# Altium PCB PCB_Motor_controller.PcbDoc
Units mil, origin at the board's own origin, x right, y up, seen from the top; angles counter-clockwise.
Board outline 3691 x 2349 mil, 2 copper layers (Top Layer, Bottom Layer); 38 components, 33 nets, 163 pads, 0 vias.
Unrouted connection lines stored in the file: 2.
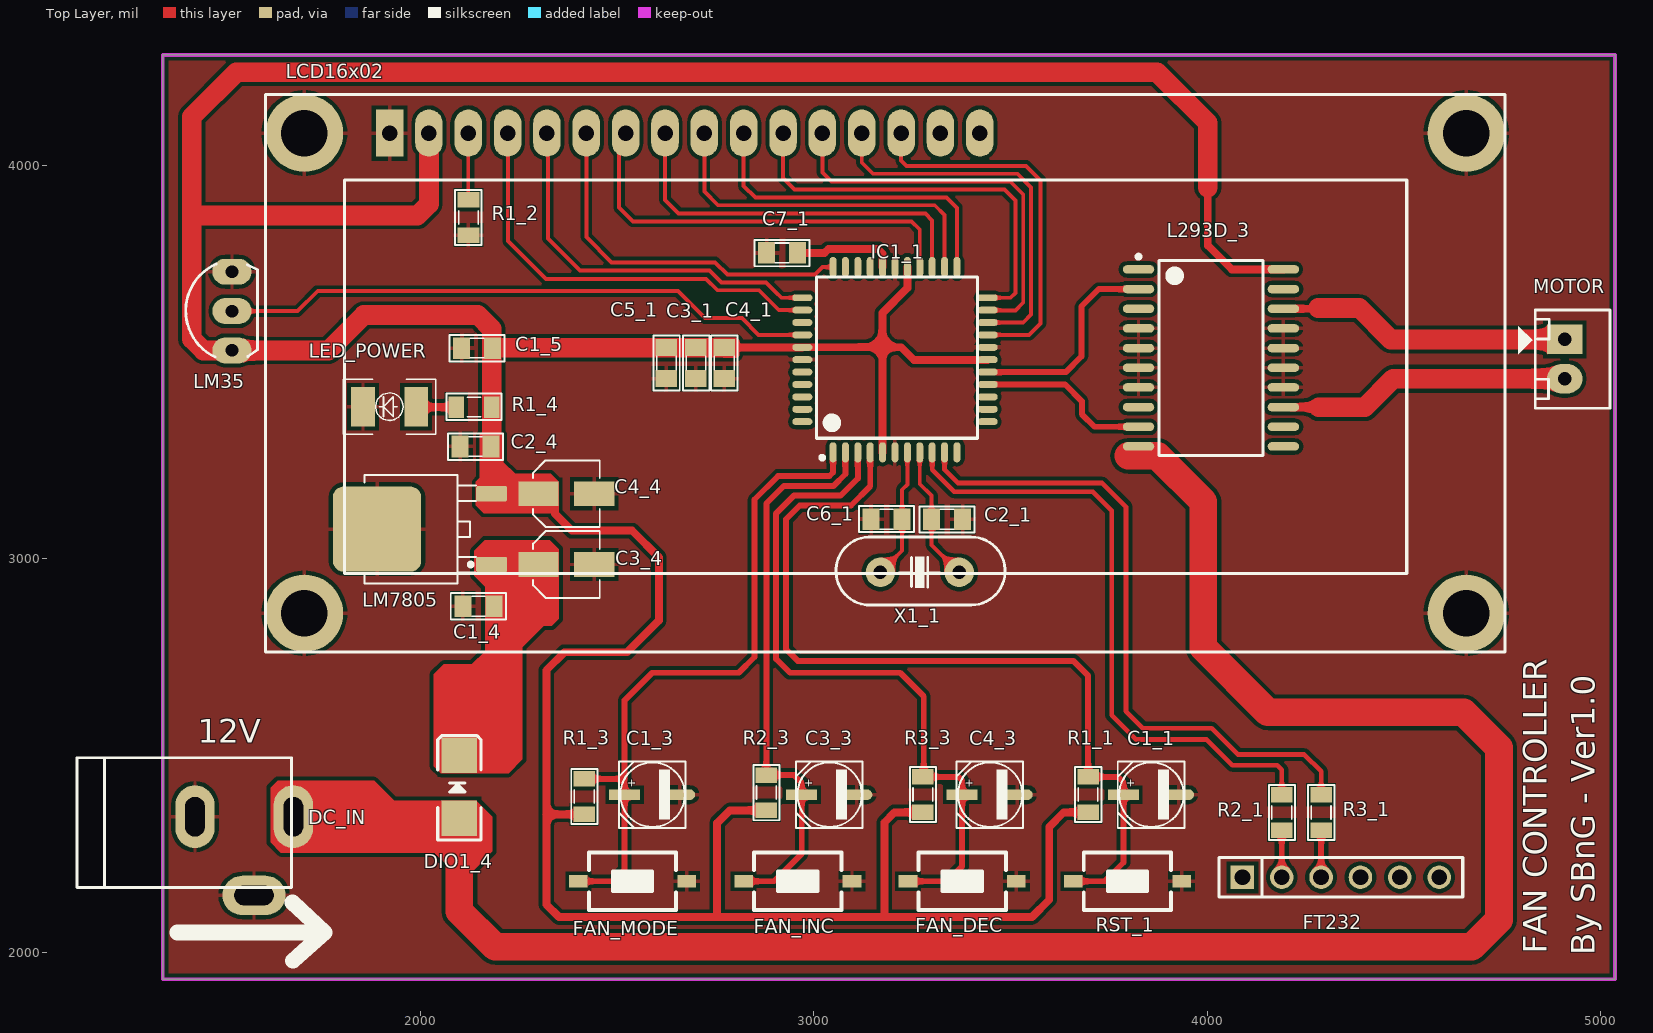
[diagram p0: Top Layer view]
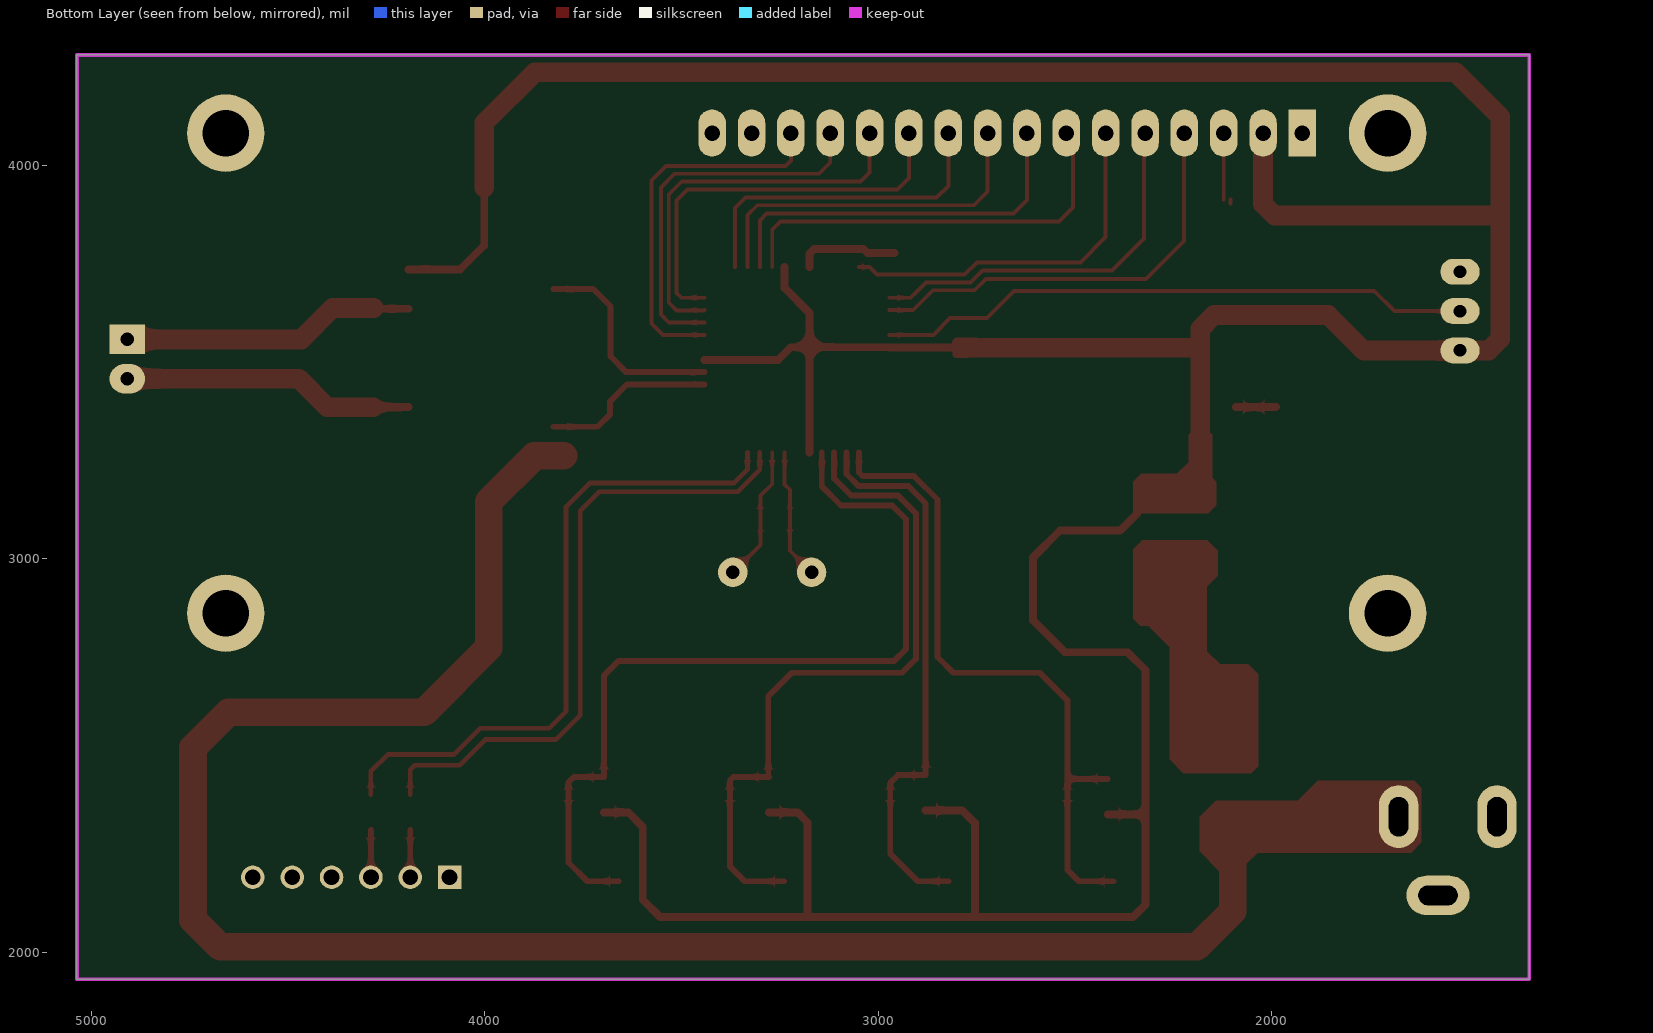
[diagram p1: Bottom Layer view, seen from below]
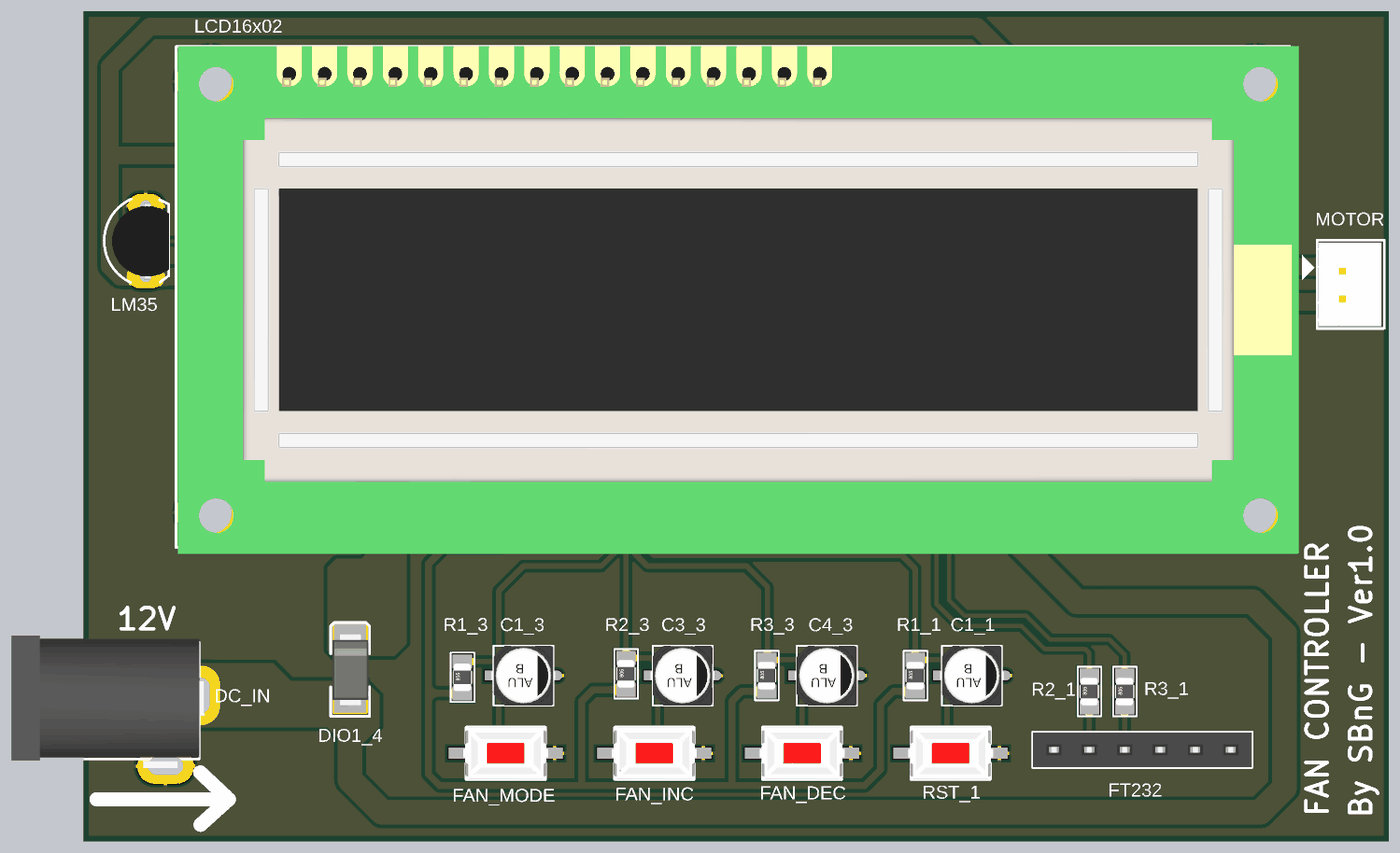
[diagram p2: 3D render of the assembled board from above, using the file's embedded part models]

## Layer stack, top to bottom
Top Solder: solder mask 0.4, Solder Resist, Dk 3.5
Top Layer: signal copper 1.4
Dielectric 1: dielectric 12.6, FR-4, Dk 4.8
Bottom Layer: signal copper 1.4
Bottom Solder: solder mask 0.4, Solder Resist, Dk 3.5

## Board outline
1346,1931 5037,1931 5037,4280 1346,4280

## Design rules (kind name [scope] priority, off if disabled: settings)
Clearance [All] p1: gap=10 ignorepadtopadclearanceinfootprint=FALSE except(0: Arc-Hole Track-Hole SMDPad-Hole THPad-Hole Via-Hole Fill-Hole Poly-Hole Region-Hole Text-Hole)
PolygonConnect [All] p1: connectstyle=Relief reliefconductorwidth=10 reliefentries=4 polygonreliefangle="90 Angle" airgapwidth=10
RoutingVias [All] p1: holewidth=28 width=50 viastyle="Through Hole" minholewidth=28 minwidth=50 maxholewidth=28 maxwidth=50
SolderMaskExpansion [All] p1: expansion=4 istentingtop=FALSE
Width CRYSTAL [InNetClass('CRYSTAL')] p1: maxlimit=10 minlimit=10 preferedwidth=10
Width TXRX [InNetClass('TXRX')] p2: maxlimit=15 minlimit=10 preferedwidth=12
Width DIGITAL [InNetClass('DIGITAL')] p3: maxlimit=20 minlimit=10 preferedwidth=15
Width ANALOG [InNetClass('ANALOG')] p4: maxlimit=30 minlimit=10 preferedwidth=20
Width POWER [InNetClass('POWER')] p5: maxlimit=70 minlimit=20 preferedwidth=50
30 further rules are at their usual default settings.

## Classes and differential pairs
net class CRYSTAL: XTAL1 XTAL2
net class TXRX: FT_RXD FT_TXD MCU_RXD MCU_TXD
net class ANALOG: LM35_OUT
net class DIGITAL: FAN_DEC FAN_INC FAN_MODE LCD0 LCD1 LCD2 LCD3 LCD4 LCD5 LCD6 LCD7 LCD_E LCD_RS LCD_RW MOTOR_OUT1 MOTOR_OUT2 NetLCD16x02_3 RST
net class POWER: +12_A +12_B AREF GND MOTOR_+ MOTOR_- VCC VCC_LED_IN
component class U_SENSOR: C1_5 LM35
component class U_POWER: C1_4 C2_4 C3_4 C4_4 DC_IN DIO1_4 LED_POWER LM7805 R1_4
component class U_MOTOR: C1_3 C3_3 C4_3 FAN_DEC FAN_INC FAN_MODE L293D_3 MOTOR R1_3 R2_3 R3_3
component class U_MCU: C1_1 C2_1 C3_1 C4_1 C5_1 C6_1 C7_1 FT232 IC1_1 R1_1 R2_1 R3_1 RST_1 X1_1
component class U_LCD: LCD16x02 R1_2

## Components (designator, comment, footprint, x,y, rotation, side; value= is the part's Value field where it differs from the comment)
C1_1 "10uF/50V" CAP-ALU-SMD-5.5x5.5 3857.8,2400 r0 top
C1_3 "10uF/50V" CAP-ALU-SMD-5.5x5.5 2590,2400 r0 top
C1_4 "104" CN-SMD-0805 2148,2879 r0 top value=33pF
C1_5 "104" CN-SMD-0805 2145,3535 r0 top value=33pF
C2_1 "22p" CN-SMD-0805 3339.36,3099.99 r0 top value=33pF
C2_4 "104" CN-SMD-0805 2141.36,3284.99 r0 top value=33pF
C3_1 "104" CN-SMD-0805 2701.01,3496.63 r90 top value=33pF
C3_3 "10uF/50V" CAP-ALU-SMD-5.5x5.5 3040,2400 r0 top
C3_4 "1000uF/25V" CAP-ALU-SMD-4.5x5x1.4 2372,2985 r0 top
C4_1 "104" CN-SMD-0805 2773.01,3496.63 r90 top value=33pF
C4_3 "10uF/50V" CAP-ALU-SMD-5.5x5.5 3447.8,2400 r0 top
C4_4 "1000uF/25V" CAP-ALU-SMD-4.5x5x1.4 2372,3165 r0 top
C5_1 "104" CN-SMD-0805 2626.01,3496.63 r90 top value=33pF
C6_1 "22p" CN-SMD-0805 3185.64,3100.01 r180 top value=33pF
C7_1 "104" CN-SMD-0805 2920,3777 r0 top value=33pF
DC_IN "Jac DC" DC0 1553,2244 r0 top
DIO1_4 "Diode SMD" DIO-SMD-106 2100,2420 r270 top value=1N5007
FAN_DEC "RST" SW1-SMD 3377.8,2180 r180 top value="SW chip 2 pin"
FAN_INC "RST" SW1-SMD 2960,2180 r180 top value="SW chip 2 pin"
FAN_MODE "RST" SW1-SMD 2540,2180 r180 top value="SW chip 2 pin"
FT232 "JP6" JP6-C1T 4090,2190 r0 top
IC1_1 "ATMEL 16A" TQFP44 3207.01,3505.47 r90 top value="Atmega 16L"
L293D_3 "L293D" SO20 4010,3510 r0 top
LCD16x02 "LCD 16x2A" LCD16X2 1922.54,4081.47 r0 top value=LCD16x2A
LED_POWER "LED" LED-RED-0805 1990,3386 r180 top value="LED 3 - 5 ly 2 Colour"
LM35 "LM35" TO92-123 1522,3629 r90 top
LM7805 "LM78xx" TO252-123 2036.33,3074.96 r90 top
MOTOR "MOTOR" Header2 4909,3557 r270 top
R1_1 "10k" RES-SMD-0805 3697.8,2400 r90 top
R1_2 "1k" RES-SMD-0805 2123,3867 r270 top
R1_3 "10k" RES-SMD-0805 2417.2,2395 r90 top
R1_4 "1k" RES-SMD-0805 2137,3385 r180 top
R2_1 "10k" RES-SMD-0805 4190,2355 r90 top
R2_3 "10k" RES-SMD-0805 2880,2405 r90 top
R3_1 "10k" RES-SMD-0805 4290,2355 r90 top
R3_3 "10k" RES-SMD-0805 3277.8,2400 r90 top
RST_1 "RST" SW1-SMD 3797.8,2180 r180 top value="SW chip 2 pin"
X1_1 "8Mhz" XT2 3270,2965 r0 top value=4Mhz

## Footprints (in the part's own frame and the unit in brackets; to place one, negate y for a bottom-side part, rotate by r counter-clockwise, add the part's x,y. Pads: shape width x height; smd on the part's side, far side on the other; paste and mask are expansions set on the pad)
CAP-ALU-SMD-4.5x5x1.4 [mm]
  rect 2.6x1.6 smd: 1(-1.8,0) 2(1.8,0)
  silkscreen extent -2.15,-2.15 2.15,2.15, body extent -2.5,-2.15 2.5,2.15, height 5.45
CAP-ALU-SMD-5.5x5.5 [mm]
  rect 2x0.7 smd: 1(-1.778,0)
  oval 2x0.7 smd: 2(1.778,0)
  silkscreen extent -2.15,-2.15 2.15,2.15, body extent -2.3,-2.15 2.3,2.15, height 5.4
CN-SMD-0805 [mil]
  rect 43.31x55 smd: 1(-39.36,0.01) 2(39.37,0.01)
  silkscreen extent -70,-34 70,33, body extent -39,-25 39,25, height 31
DC0 [mil] "Jac DC input"
  oval 100x160 hole 50 slot 100 at 90 deg: 1(125,100) 2(-125,100)
  oval 160x100 hole 50 slot 100 at 0 deg: 3(25,-100)
  silkscreen extent -425,-80 120,250, body extent -410,-105 134,269, height 434
DIO-SMD-106 [mil]
  rect 90x90.55 smd: 1(80,0) 2(-80,0)
  silkscreen extent -130,-55 135,55, body extent -99,-50 106,52, height 95
Header2 [mil] "CON2"
  rect 75x90 hole 34: 1(0,0)
  oval 75x90 hole 34: 2(100,0)
  silkscreen extent -75,-118 175,115, body extent -68,-70 168,107, height 236
JP6-C1T [mm] "6 row, straight, gold plating"
  rect 1.52x1.52 hole 1.02: 1(0,0)
  round 1.52 hole 1.02: 2(2.54,0) 3(5.08,0) 4(7.62,0) 5(10.16,0) 6(12.7,0)
  silkscreen extent -1.52,-1.27 14.22,1.27, body extent -1.52,-1.25 14.22,1.25, height 8.51
LCD16X2 [mm] "LCD dipslay 16x2, 16 pin"
  round 5 hole 3: 1(-5.5,-31) 1(-5.5,0) 1(69.5,-31) 1(69.5,0)
  rect 1.778x3.048 hole 1: 1(0,0)
  oval 1.778x3.048 hole 1: 2(2.54,0) 3(5.08,0) 4(7.62,0) 5(10.16,0) 6(12.7,0) 7(15.24,0) 8(17.78,0) 9(20.32,0) 10(22.86,0) 11(25.4,0) 12(27.94,0) 13(30.48,0) 14(33.02,0) 15(35.56,0) 16(38.1,0)
  round 0 all layers, no hole: ""(-5.5,0)
  silkscreen extent -8,-33.5 72,2.5, body extent -7.87,-33.96 72.64,2.54, height 18.14
LED-RED-0805 [mil]
  rect 60x100 smd: 1(0,0) 2(135,0)
  silkscreen extent -50,-70 185,70, body extent -20,-60 154,60, height 75
RES-SMD-0805 [mil]
  rect 39.37x55 smd: 1(-45,0) 2(45,0)
  silkscreen extent -70,-34 70,33, body extent -39,-25 39,25, height 31
SO20 [mm] "SOIC, 20-Leads, Body 12.60x7.50mm, Pitch 1.27mm, IPC Medium Density"
  oval 2.032x0.55 smd: 1(-4.675,5.715) 2(-4.675,4.445) 3(-4.675,3.175) 4(-4.675,1.905) 5(-4.675,0.635) 6(-4.675,-0.635) 7(-4.675,-1.905) 8(-4.675,-3.175) 9(-4.675,-4.445) 10(-4.675,-5.715) 11(4.675,-5.715) 12(4.675,-4.445) 13(4.675,-3.175) 14(4.675,-1.905) 15(4.675,-0.635) 16(4.675,0.635) 17(4.675,1.905) 18(4.675,3.175) 19(4.675,4.445) 20(4.675,5.715)
  silkscreen extent -4.8,-6.3 3.35,6.66, body extent -5.07,-6.3 5.07,6.3, height 2.25
SW1-SMD [mm]
  rect 1.2x0.8 smd: 1(-3.5,0) 2(3.5,0)
  silkscreen extent -2.82,-1.85 2.82,1.85, body extent -3.05,-1.85 3.05,1.85, height 2.5
TO92-123 [mil] "TO-92"
  oval 66x100 hole 32: 1(-100,0) 2(0,0) 3(100,0)
  silkscreen extent -117,-65 120,118, body extent -109,-66 109,95, height 245
TO252-123 [mm]
  round 0.5 on Mech15: 0(0,0)
  rrect25% 1x2 smd: 1(-2.285,-3.7) 3(2.285,-3.7)
  rrect25% 5.5x5.7 smd: 2(0,3.7)
  silkscreen extent -3.5,-2.7 3.5,4.5, body extent -3.3,-3.95 3.3,5.76, height 2.31
TQFP44 [mm] "TQFP, 44-Leads, Body 10X10mm, Pitch 0.80mm, IPC High Density"
  oval 1.3x0.45 smd: 1(-5.981,4) 2(-5.981,3.2) 3(-5.981,2.4) 4(-5.981,1.6) 5(-5.981,0.8) 6(-5.981,0) 7(-5.981,-0.8) 8(-5.981,-1.6) 9(-5.981,-2.4) 10(-5.981,-3.2) 11(-5.981,-4) 23(5.981,-4) 24(5.981,-3.2) 25(5.981,-2.4) 26(5.981,-1.6) 27(5.981,-0.8) 28(5.981,0) 29(5.981,0.8) 30(5.981,1.6) 31(5.981,2.4) 32(5.981,3.2) 33(5.981,4)
  oval 0.45x1.3 smd: 12(-4,-5.981) 13(-3.2,-5.981) 14(-2.4,-5.981) 15(-1.6,-5.981) 16(-0.8,-5.981) 17(0,-5.981) 18(0.8,-5.981) 19(1.6,-5.981) 20(2.4,-5.981) 21(3.2,-5.981) 22(4,-5.981) 34(4,5.981) 35(3.2,5.981) 36(2.4,5.981) 37(1.6,5.981) 38(0.8,5.981) 39(0,5.981) 40(-0.8,5.981) 41(-1.6,5.981) 42(-2.4,5.981) 43(-3.2,5.981) 44(-4,5.981)
  silkscreen extent -6.45,-5.33 5.33,5.07, body extent -5.99,-5.96 6.01,6.04, height 1.05
XT2 [mil] "Footpin for Crystal 2 pin"
  round 75 hole 34: 1(-100,0) 2(100,0)
  silkscreen extent -213,-83 217,90, body extent -216,-87 216,90, height 144

## Part data
C1_1 C1_3 C3_3 C3_4 C4_3 C4_4: library part CN-ALU-SMD, "Polarized Capacitor (Axial)", LatestRevisionDate=17-Jul-2002, LatestRevisionNote="Re-released for DXP Platform.", PackageReference=POLAR0.8, Published=8-Jun-2000, Publisher="Altium Limited"
C1_4 C1_5 C2_1 C2_4 C3_1 C4_1 C5_1 C6_1 C7_1: library part CN
DC_IN: library part DCIN, "Jac DC input"
DIO1_4: "Default Diode", Code - JEDEC=DO-214-AB, Published=8-Jun-2000, Publisher="Altium Limited", Revision="July-2002: Re-released for DXP Platform."
FAN_DEC FAN_INC FAN_MODE RST_1: library part SW2, "Switch button 2 pin"
FT232: "WR-PHD 2.54 mm Angled Socket Header", Manufacturer="W¨¹rth Elektronik eiSos GmbH", partNo=613006143121, ComponentLink1 Description=Manufacturer, ComponentLink1URL=http://www.we-online.com, ComponentLink2 Description=Datasheet, ComponentLink2URL=http://katalog.we-online.de/em/datasheet/6130xx143121.pdf, Created by="Karrer Zheng", Created Date="29 March 2013", NoPins=06
IC1_1: library part ATmega16A-AU, "8-bit AVR Microcontroller, 16KB Flash, 512 Bytes EEPROM, 1KB SRAM, 44-pin TQFP, Industrial Grade (-40°C to 85°C)"
L293D_3: library part L293D_SMD, "Push-Pull Four Channel Driver With Diode", ComponentLink1Description="Manufacturer Link", ComponentLink1URL=http://www.st.com/, ComponentLink2Description=Datasheet, ComponentLink2URL=http://www.st.com/stonline/products/literature/ds/1330/l293d.pdf, DatasheetVersion=Jun-1996, LatestRevisionDate=06-Jun-2005, LatestRevisionNote="Stylized 3D Model Added.", PackageDescription="DIP; 16 Leads; Row Spacing 7.62 mm; Pitch 2.54 mm", PackageReference=DIP16, PackageVersion=Apr-1996, Published=8-Jun-2000, Publisher="Altium Limited"
LCD16x02: library part LCD16x2A, "LCD dipslay 16 char, 2 line"
LED_POWER: library part "LED SMD"
LM35: "Teminal"
LM7805: "Positive Voltage Regulator", ComponentLink1Description="Manufacturer Link", ComponentLink1URL=http://www.st.com/, ComponentLink2Description=Datasheet, ComponentLink2URL=http://www.st.com/stonline/products/literature/ds/2146/l78m05c.pdf, DatasheetVersion=Apr-1994, LatestRevisionDate=17-Jul-2002, LatestRevisionNote="Re-released for DXP Platform.", Note="Tab is connected to pin 3 (GND).", PackageDescription="TO, Thru-Hole, Vertical, Heatsink Mounted; 3 In-Line Leads; Pitch 2.54 mm; Pin sequence 1, 3, 2", PackageReference=ISOWATT220AB, PackageVersion=Jul-1998, Published=24-Aug-2001, Publisher="Altium Limited"
MOTOR: library part Header2, "Header IDC, 2 x 1 Pin Vertical 2.54mm Pitch (Non-Boxed, Male)", Manufacturer="W¨¹rth Elektronik eiSos GmbH", partNo=613002143121, ComponentLink1 Description=Manufacturer, ComponentLink1URL=http://www.we-online.com, ComponentLink2 Description=Datasheet, ComponentLink2URL=http://katalog.we-online.de/em/datasheet/6130xx143121.pdf, Created by="Karrer Zheng", Created Date="29 March 2013", NoPins=02
R1_1 R1_2 R1_3 R1_4 R2_1 R2_3 R3_1 R3_3: library part Res-SMD, "Resistor", Manufacturer="Generic Components", Class=Passive, Published=08/06/2000, Publisher="Altium Hobart Technology Centre"
X1_1: library part XT2, "Crystal, 32.768 KHz, -40 to 85 degC, 3.2 x 1.5 x 0.9 mm SMD"

## Nets (pads, with @x,y where several pads share a name; then routed paths per layer and width w, separated by ;. In a path a pad name is that pad's centre, name@x,y a point inside that pad or via, vN(x,y) a via of type N, cw(c..) or ccw(c..) an arc to the next point about the centre after c; other vN are vias at no path point)
+12_A: DC_IN.1 DIO1_4.1 L293D_3.10 | length 5270.7
  Top Layer w50: DC_IN.1 1680,2342 1980,2342
  Top Layer w70: 1980,2340 DIO1_4.1 2100,2104 2191,2013 4673,2013 4742,2082 4742,2519 4652,2609 4155,2609 3991,2773 3991,3144 3874.17,3260.83 3825.94,3260.83 3800,3260.83
+12_B: C1_4.2 C3_4.1 DIO1_4.2 LM7805.1
AREF: C7_1.2 IC1_1.29 | length 258.8
  Top Layer w20: C7_1.2 3028.05,3777.01 3037.57,3786.54 3163.8,3786.54 3175.51,3774.82 IC1_1.29
FAN_DEC: C4_3.1 FAN_DEC.2 IC1_1.3 R3_3.2 | length 1776.3
  Top Layer w15: IC1_1.3 3112.52,3203.79 3068.73,3160 2950,3160 2905,3115 2905,2745 2940,2710 3220,2710 3280,2650 3280,2447.2 R3_3.2 3369.01,2445 3377.8,2436.21 3377.8,2217.8 3340,2180 FAN_DEC.2
FAN_INC: C3_3.1 FAN_INC.2 IC1_1.2 R2_3.2 | length 1432.2
  Top Layer w15: FAN_INC.2 2900,2180 2970,2250 C3_3.1 2970,2430 2950,2450 R2_3.2 2880,3140 2925,3185 3051.1,3185 3081.02,3214.93 IC1_1.2
FAN_MODE: C1_3.1 FAN_MODE.2 IC1_1.1 R1_3.2 | length 1718.4
  Top Layer w15: FAN_MODE.2 2491,2180 2520,2209 C1_3.1 2520,2440 ; R1_3.2 2520,2440 ; IC1_1.1 3049.53,3218.79 3040.74,3210 2910,3210 2850,3150 2850,2750 2810,2710 2590,2710 2520,2640 2520,2440
FT_RXD: FT232.3 R3_1.1 | length 120
  Top Layer w15: FT232.3 R3_1.1
FT_TXD: FT232.2 R2_1.1 | length 120
  Top Layer w15: FT232.2 R2_1.1
GND: C1_1.2 C1_3.2 C1_4.1 C1_5.1 C2_1.2 C2_4.1 C3_1.1 C3_3.2 C3_4.2 C4_1.1 C4_3.2 C4_4.2 C5_1.1 C6_1.2 C7_1.1 DC_IN.2 DC_IN.3 FAN_DEC.1 FAN_INC.1 FAN_MODE.1 IC1_1.6 IC1_1.18 IC1_1.28 IC1_1.39 L293D_3.4 L293D_3.5 L293D_3.6 L293D_3.7 L293D_3.14 L293D_3.15 L293D_3.16 L293D_3.17 LCD16x02.1 LED_POWER.2 LM35.3 LM7805.2 R1_2.2 RST_1.1
LCD0: IC1_1.26 LCD16x02.7 | length 1039.8
  Top Layer w10: LCD16x02.7@2505.78,4049.47 2505.78,3892.22 2541,3857 3249,3857 3270,3836 IC1_1.26
LCD1: IC1_1.25 LCD16x02.8 | length 989
  Top Layer w10: LCD16x02.8 2622.54,3911.46 2657,3877 3284,3877 3301.5,3859.5 IC1_1.25
LCD2: IC1_1.24 LCD16x02.9 | length 916.2
  Top Layer w10: LCD16x02.9 2722.54,3932.46 2757,3898 3308,3898 3332.99,3873.01 IC1_1.24
LCD3: IC1_1.23 LCD16x02.10 | length 849.7
  Top Layer w10: LCD16x02.10 2822.54,3947.46 2852,3918 3338,3918 3364.49,3891.51 IC1_1.23
LCD4: IC1_1.22 LCD16x02.11 | length 1038.8
  Top Layer w10: LCD16x02.11 2922.54,3967.46 2952,3938 3485,3938 3513,3910 3513,3675 3500.95,3662.95 IC1_1.22
LCD5: IC1_1.21 LCD16x02.12 | length 1006.9
  Top Layer w10: LCD16x02.12 3022.54,3981.46 3046,3958 3500,3958 3533,3925 3533,3651 3513,3631 3442.94,3631 IC1_1.21
LCD6: IC1_1.20 LCD16x02.13 | length 973.6
  Top Layer w10: LCD16x02.13 3122.54,4006.47 3151.01,3978 3518,3978 3553,3943 3553,3620 3532.96,3599.96 IC1_1.20
LCD7: IC1_1.19 LCD16x02.14 | length 955.1
  Top Layer w10: LCD16x02.14 3222.54,4011.46 3236,3998 3540,3998 3577,3961 3577,3598 3547.46,3568.46 IC1_1.19
LCD_E: IC1_1.33 LCD16x02.6 | length 938.4
  Top Layer w10: LCD16x02.6 2422.54,3817.46 2487,3753 2749.8,3753 2780.8,3722 3004,3722 3022.94,3740.94 IC1_1.33
LCD_RS: IC1_1.35 LCD16x02.4 | length 1095.3
  Top Layer w10: LCD16x02.4 2224,4080.01 2224,3807 2320,3711 2727,3711 2756,3682 2861,3682 2911.54,3631.46 IC1_1.35
LCD_RW: IC1_1.34 LCD16x02.5 | length 978.2
  Top Layer w10: LCD16x02.5 2325,4079.01 2325,3813 2406,3732 2736,3732 2766,3702 2879,3702 2903,3678 2918.05,3662.95 IC1_1.34
LM35_OUT: IC1_1.37 LM35.2 | length 1516.9
  Top Layer w10: LM35.2 1689,3629 1740,3680 2655,3680 2724,3611 2818,3611 2860.54,3568.46 IC1_1.37
MCU_RXD: IC1_1.9 R2_1.2 | length 1616.4
  Top Layer w12: IC1_1.9 3301.5,3225.53 3357.03,3170 3710,3170 3758,3122 3758,2602 3820,2540 3999,2540 4064,2475 4178,2475 4190,2463 R2_1.2
MCU_TXD: IC1_1.10 R3_1.2 | length 1682.1
  Top Layer w12: IC1_1.10 3332.99,3226.41 3367.4,3192 3733.97,3192 3794,3131.97 3794,2612 3837,2569 4012,2569 4079,2502 4247,2502 4290,2459 R3_1.2
MOTOR_+: L293D_3.13 MOTOR.2 | length 744.8
  Top Layer w20: L293D_3.13 4284,3385
  Top Layer w50: 4284,3385 4401,3385 4473,3457 MOTOR.2
MOTOR_-: L293D_3.18 MOTOR.1 | length 748.9
  Top Layer w20: L293D_3.18 4281,3635 4283,3637
  Top Layer w50: 4283,3637 4387,3637 4467,3557 MOTOR.1
MOTOR_OUT1: IC1_1.16 L293D_3.2 | length 545.3
  Top Layer w15: IC1_1.16 3640.98,3473.98 3681,3514 3681,3641 3725,3685 L293D_3.2
MOTOR_OUT2: IC1_1.15 L293D_3.9 | length 447.3
  Top Layer w15: IC1_1.15 3639.52,3442.48 3682,3400 3682,3367 3714,3335 L293D_3.9
NetLCD16x02_3: LCD16x02.3 R1_2.1 | length 180.8
  Top Layer w10: R1_2.1@2105,3902 2105,3912 R1_2.1@2105.78,3912.78 ; LCD16x02.3 2122.54,3912.47 R1_2.1
RST: C1_1.1 IC1_1.4 R1_1.2 RST_1.2 | length 2164.6
  Top Layer w15: IC1_1.4 3144.02,3184.02 3095,3135 2965,3135 2930,3100 2930,2770 2960,2740 3660,2740 3697.8,2702.2 R1_1.2 3774.01,2445 3787.8,2431.21 C1_1.1 3787.8,2227.8 3740,2180 RST_1.2
VCC: C1_5.2 C2_4.2 C3_1.2 C4_1.2 C4_4.1 C5_1.2 IC1_1.5 IC1_1.17 IC1_1.27 IC1_1.38 L293D_3.20 LCD16x02.2 LM35.1 LM7805.3 R1_1.1 R1_3.1 R1_4.1 R2_3.1 R3_3.1 | length 11379.9
  Top Layer w20: C4_4.1 2320.82,3165 2342.32,3143.5 2342.32,3114.68 2386,3071 2539,3071 2607,3003 2607,2843 2526,2762 2367,2762 2321,2716 2321,2350 ; R1_3.1 2321,2350 ; C4_1.2 2773.48,3536.48 IC1_1.38@2971.05,3536.48 ; R2_3.1 2787,2360 2755,2328 2755,2091 2757,2089 ; IC1_1.38 3175,3536.97 ; IC1_1.5 3175.51,3536.46 3175,3536.97 ; IC1_1.27 3238.5,3687.5 3175,3624 3175,3536.97 ; R3_3.1 3206,2355 3180,2329 3180,2090 3181,2089 ; IC1_1.17 3442.01,3505 3255,3505 3223.03,3536.97 3175,3536.97 ; R1_1.1 3636,2355 3599,2318 3599,2133 3555,2089 3181,2089 ; 4002,3943 4002,3796 4063,3735 L293D_3.20 ; 2321,2350 2321,2121 2353,2089 2757,2089 ; 2757,2089 3181,2089
  Top Layer w50: LCD16x02.2 2022.54,3901.29 1993.25,3872 1420,3872 ; C2_4.2 2181.87,3286.13 2181.87,3385 2181.87,3535.01 2181.87,3584.13 2147,3619 1857,3619 1767,3529 LM35.1 1449.29,3529 1420,3558.29 1420,3872 ; C1_5.2 2185.37,3536 C5_1.2 C3_1.2 C4_1.2 ; 4002,3943 4002,4107 3873,4236 1533,4236 1420,4123 1420,3872
VCC_LED_IN: LED_POWER.1 R1_4.2 | length 102.4
  Top Layer w20: LED_POWER.1 1991,3385 R1_4.2
XTAL1: C2_1.1 IC1_1.8 X1_1.2 | length 346.4
  Top Layer w10: IC1_1.8 3270,3190 3300,3160 C2_1.1 3300,3035 X1_1.2
XTAL2: C6_1.1 IC1_1.7 X1_1.1 | length 333.4
  Top Layer w10: X1_1.1 3225,3020 C6_1.1 3225,3175 3238.5,3188.5 IC1_1.7
pads on no net: FT232.1 FT232.4 FT232.5 FT232.6 IC1_1.11 IC1_1.12 IC1_1.13 IC1_1.14 IC1_1.30 IC1_1.31 IC1_1.32 IC1_1.36 IC1_1.40 IC1_1.41 IC1_1.42 IC1_1.43 IC1_1.44 L293D_3.1 L293D_3.3 L293D_3.8 L293D_3.11 L293D_3.12 L293D_3.19 LCD16x02. LCD16x02.15 LCD16x02.16 LM7805.0

## Polygon pours and split planes (outlines as drawn)
GND on Top Layer "GND_L01_P000" (solid, remove dead copper, pour order 0): 1349,4275 5035,4275 5035,1931 1349,1931

## Keep-outs
Keep-Out Layer:
  lines w10: 1346,1931 1346,4096 1346,4280 5037,4280 5037,1931 1346,1931

## Other copper
Top Layer:
  region net +12_A: 1703,2436 1638,2436 1620,2418 1620,2279 1646,2253 2036,2253 2065,2224 2065,2195 2131,2195 2134,2192 2134,2206 2184,2256 2184,2344 2143,2385 1934,2385 1884,2435 1704,2435
  region net VCC: 3112,3547 3131,3547 ccw(c3131,3581) 3165,3581 cw(c3166,3581) 3166,3582 3184,3582 ccw(c3220,3582) 3220,3546 3222,3546 3222,3542 cw(c3207,3542) 3207,3527 ccw(c3207,3505) 3185,3505 3185,3497 3167,3497 ccw(c3136,3497) 3136,3528 3123,3528
  region net VCC: 2748,3561 2801,3561 cw(c2801,3550) 2812,3550 ccw(c2816,3550) 2816,3546 2847,3546 cw(c2828,3546) 2828,3527 2815,3527 ccw(c2815,3523) 2811,3523 2811,3518 cw(c2804,3518) 2804,3511 2770,3511
  region net +12_B: 2035,2472 2052,2455 2225,2455 2260,2490 2260,2775 2314,2829 2335,2829 2353,2847 2353,3024 2330,3047 2165,3047 2138,3020 2138,2956 2166,2928 2166,2765 2132,2731 2060,2731 2035,2706
  region net VCC: 2162,3325 2152,3315 2152,3205 2142,3195 2142,3135 2162,3115 2342,3115 2352,3125 2352,3195 2332,3215 2242,3215 2212,3245 2212,3315 2202,3325

## Silkscreen, mask and mechanical layers (free items; w line width, h text height)
Top Overlay:
  lines w40: 1383,2050 1757,2050 ; 1676,2126 1757,2050 ; 1677,1978 1757,2050
  text "12V" at 1435,2532 h60
  text "FAN CONTROLLER" at 4863,1996 h60 r90
  text "By SBnG - Ver1.0" at 4986.01,1992 h60 r90

## Text inside footprints (layer, text, board x,y; h text height)
C1_1: Top Overlay "+" at 3794.8,2412.8 h35
C1_3: Top Overlay "+" at 2527.01,2412.8 h35
C3_3: Top Overlay "+" at 2977.01,2412.8 h35
C4_3: Top Overlay "+" at 3384.8,2412.8 h35